# EAGLE board HTVC8038 (EAGLE 7.4.0)
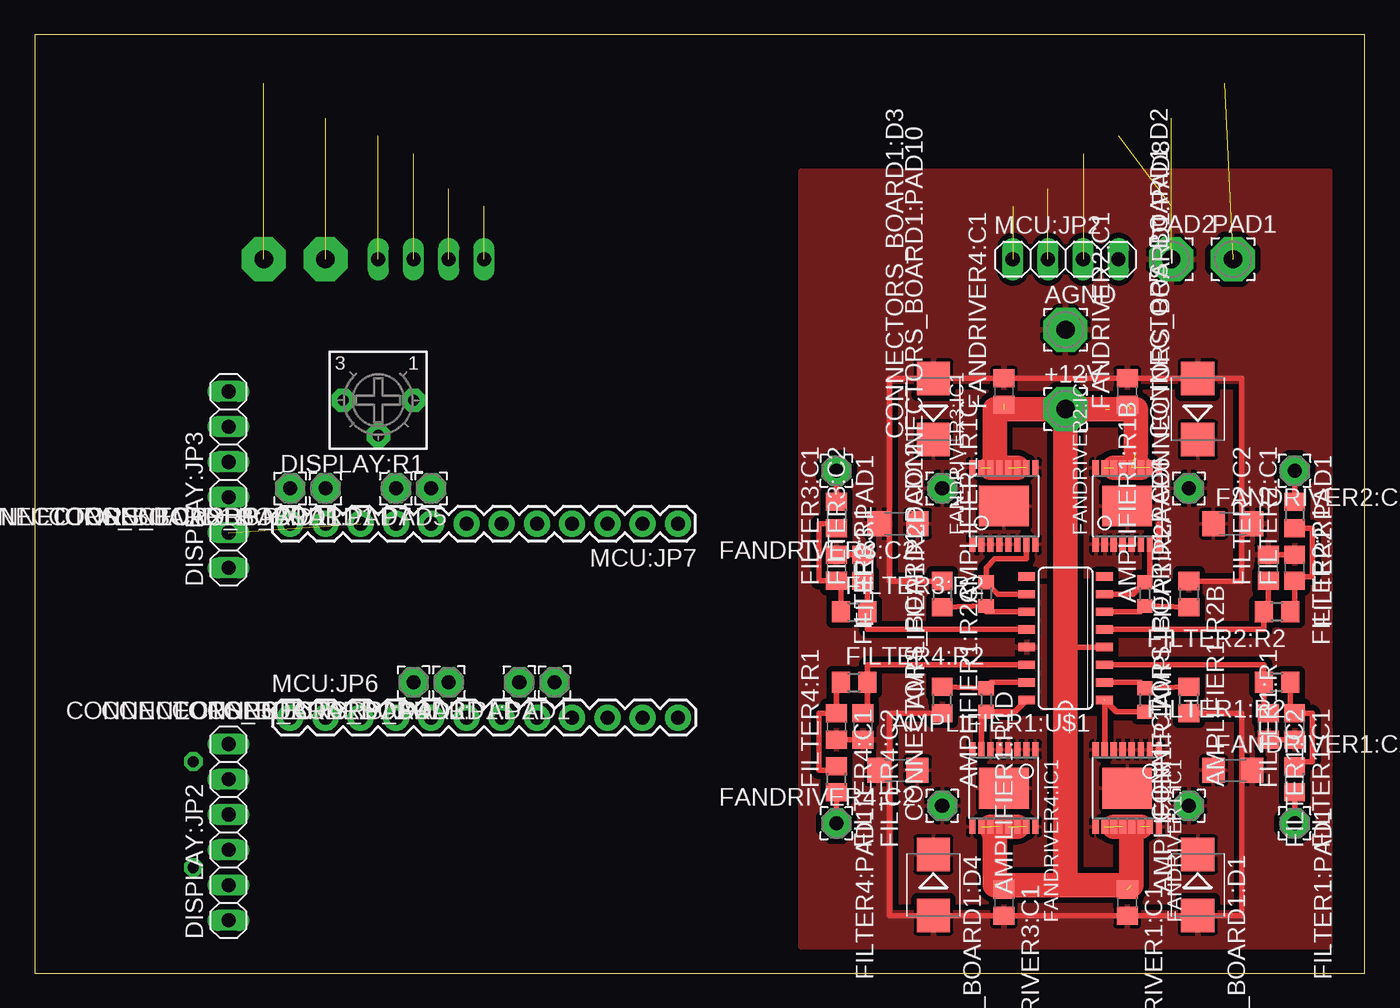
[diagram p0: board, top side]
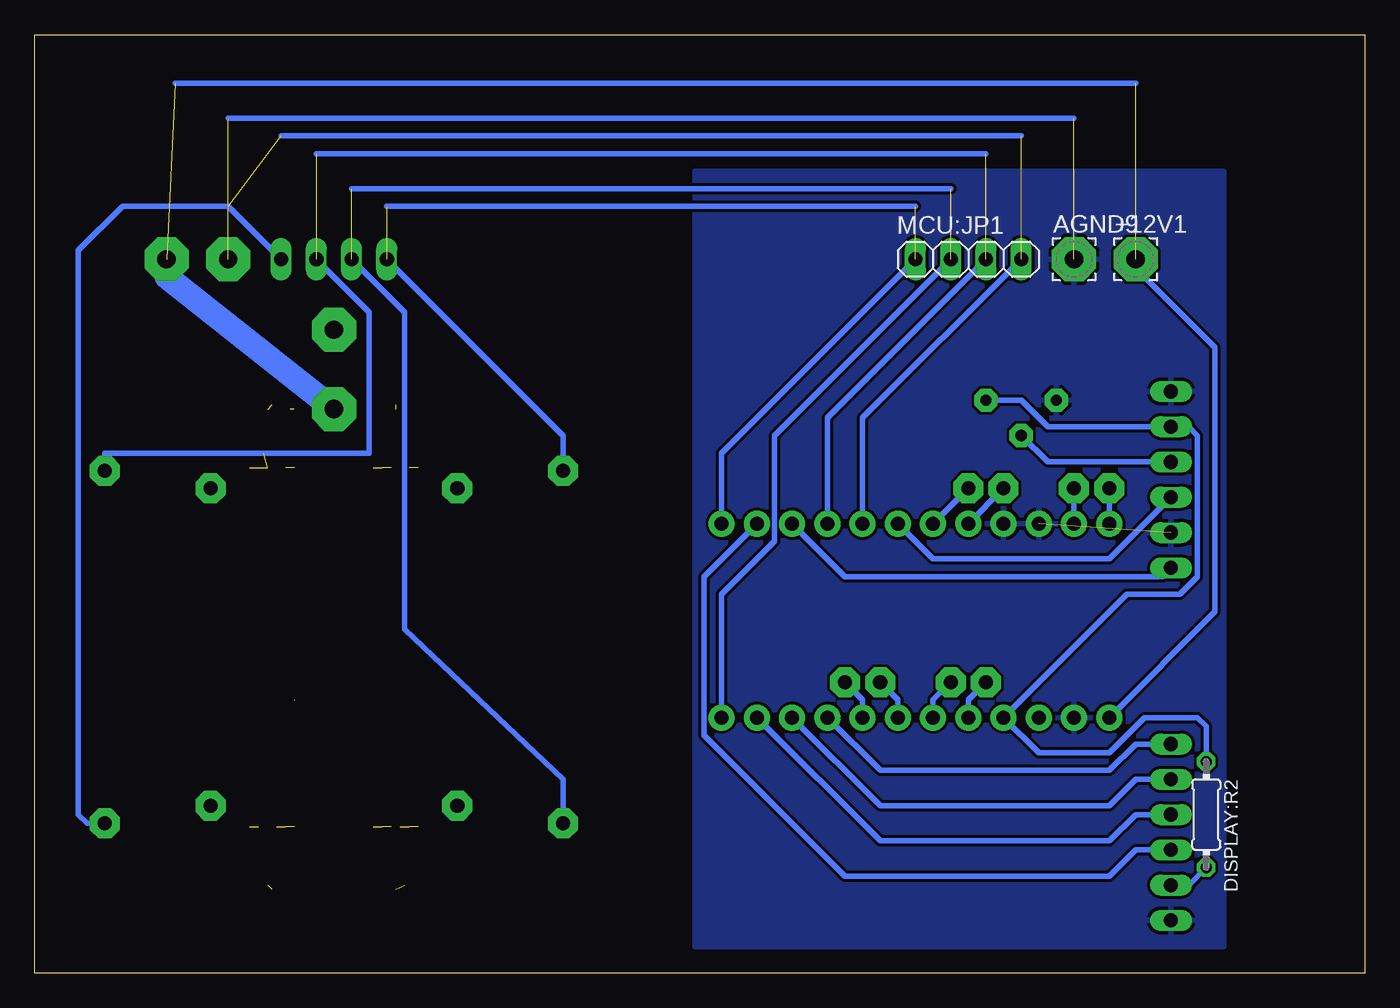
[diagram p1: board, bottom side, seen from below]

Size 95.87 x 67.62 mm. Coordinates in mm from the lower left corner, seen from the top.
Outline: 0,0 95.87,0 95.87,67.62 0,67.62 0,0
Copper layers (1*16): Top 0.035mm / dielectric 1.5mm / Bottom 0.035mm
Design rules "default *": minimum track width 10mil, minimum drill 24mil, track to track 8mil, track to pad 8mil, pad to pad 8mil, via to via 8mil, smd to smd 8mil, copper to edge 40mil, drill to drill 8mil, minimum pad ring 10mil, minimum via ring 8mil, stop-mask expansion 4mil, vias tented up to drill 0mil, thermal gap 10mil

## Footprints (pad centres in the part's own frame; a part is rotated, then mirrored left to right if it is on the bottom)
3,17/1,3 = drill 1.321 pad 3.175 octagon: 1 0,0
R0603 = smd 1 x 1.1: 1 -0.85,0; 2 0.85,0
R0805 = smd 1.3 x 1.5: 1 -0.95,0; 2 0.95,0
SO16 = smd 0.6 x 1.2: 1 -4.445,-2.8; 2 -3.175,-2.8; 3 -1.905,-2.8; 4 -0.635,-2.8; 5 0.635,-2.8; 6 1.905,-2.8; 7 3.175,-2.8; 8 4.445,-2.8; 9 4.445,2.8; 10 3.175,2.8; 11 1.905,2.8; 12 0.635,2.8; 13 -0.635,2.8; 14 -1.905,2.8; 15 -3.175,2.8; 16 -4.445,2.8
SMB-403A = smd 2.4 x 2.4: A 2.2,0; C -2.2,0
2,15/1,0 = drill 1.016 pad 2.159 octagon: 1 0,0
1X06 = drill 1.016 long: 1 -6.35,0; 2 -3.81,0; 3 -1.27,0; 4 1.27,0; 5 3.81,0; 6 6.35,0
3362P = drill 0.813 pad 1.676 octagon: 1 -2.54,0; 2 0,2.54; 3 2.54,0
0204/7 = drill 0.813 octagon: 1 -3.81,0; 2 3.81,0
C0805 = smd 1.3 x 1.5: 1 -0.95,0; 2 0.95,0
C1206 = smd 1.6 x 1.8: 1 -1.4,0; 2 1.4,0
TSSOP16EXP = smd 0.45 x 1.05: 1 -2.275,-2.768; 2 -1.625,-2.768; 3 -0.975,-2.768; 4 -0.325,-2.768; 5 0.325,-2.768; 6 0.975,-2.768; 7 1.625,-2.768; 8 2.275,-2.768; 9 2.275,2.768; 10 1.625,2.768; 11 0.975,2.768; 12 0.325,2.768; 13 -0.325,2.768; 14 -0.975,2.768; 15 -1.625,2.768; 16 -2.275,2.768 | smd 3.58 x 2.94: EXP 0,0
1X04 = drill 1.016 long: 1 -3.81,0; 2 -1.27,0; 3 1.27,0; 4 3.81,0
1X12 = drill 1.016 pad 1.88: 1 0,0; 2 2.54,0; 3 5.08,0; 4 7.62,0; 5 10.16,0; 6 12.7,0; 7 15.24,0; 8 17.78,0; 9 20.32,0; 10 22.86,0; 11 25.4,0; 12 27.94,0

## Placement (x,y rotation side)
+12V  [3,17/1,3]  74.29,40.64 0 top
+12V1  [3,17/1,3]  16.51,51.43 0 bottom
AGND  [3,17/1,3]  74.29,46.35 0 top
AGND9  [3,17/1,3]  20.95,51.43 0 bottom
AMPLIFIER1:R1A  14K  [R0603]  80.01,19.69 270 top
AMPLIFIER1:R1B  14K  [R0603]  80.01,27.3 90 top
AMPLIFIER1:R1C  14K  [R0603]  68.58,27.3 90 top
AMPLIFIER1:R1D  14K  [R0603]  68.58,19.69 270 top
AMPLIFIER1:R2A  10K  [R0805]  83.19,19.69 90 top
AMPLIFIER1:R2B  10K  [R0805]  83.19,27.3 270 top
AMPLIFIER1:R2C  10K  [R0805]  65.41,27.3 270 top
AMPLIFIER1:R2D  10K  [R0805]  65.41,19.69 90 top
AMPLIFIER1:U$1  LT1014  [SO16]  74.29,24.13 90 top
CONNECTORS_BOARD1:D1  MBRS240LT3  [SMB-403A]  83.82,6.35 270 top
CONNECTORS_BOARD1:D2  MBRS240LT3  [SMB-403A]  83.82,40.64 90 top
CONNECTORS_BOARD1:D3  MBRS240LT3  [SMB-403A]  64.77,40.64 90 top
CONNECTORS_BOARD1:D4  MBRS240LT3  [SMB-403A]  64.77,6.35 270 top
CONNECTORS_BOARD1:PAD1  [2,15/1,0]  37.47,20.95 180 top
CONNECTORS_BOARD1:PAD2  [2,15/1,0]  34.92,20.95 180 top
CONNECTORS_BOARD1:PAD3  [2,15/1,0]  29.84,20.95 180 top
CONNECTORS_BOARD1:PAD4  [2,15/1,0]  27.31,20.95 180 top
CONNECTORS_BOARD1:PAD5  [2,15/1,0]  28.58,34.93 180 top
CONNECTORS_BOARD1:PAD6  [2,15/1,0]  83.19,12.07 90 top
CONNECTORS_BOARD1:PAD7  [2,15/1,0]  26.03,34.93 180 top
CONNECTORS_BOARD1:PAD8  [2,15/1,0]  83.19,34.93 90 top
CONNECTORS_BOARD1:PAD9  [2,15/1,0]  18.42,34.93 180 top
CONNECTORS_BOARD1:PAD10  [2,15/1,0]  65.41,34.93 90 top
CONNECTORS_BOARD1:PAD11  [2,15/1,0]  20.95,34.93 180 top
CONNECTORS_BOARD1:PAD12  [2,15/1,0]  65.41,12.07 90 top
DISPLAY:JP2  [1X06]  13.97,10.16 90 top
DISPLAY:JP3  [1X06]  13.97,35.56 90 top
DISPLAY:R1  10k  [3362P]  24.77,41.27 180 top
DISPLAY:R2  470R  [0204/7]  11.43,11.43 270 bottom
FANDRIVER1:C1  2.2uF  [C0805]  78.74,5.08 270 top
FANDRIVER1:C2  10uF  [C1206]  86.36,14.61 0 top
FANDRIVER1:IC1  LT3083EFE  [TSSOP16EXP]  78.74,13.34 180 top
FANDRIVER2:C1  2.2uF  [C0805]  78.74,41.91 90 top
FANDRIVER2:C2  10uF  [C1206]  86.36,32.38 0 top
FANDRIVER2:IC1  LT3083EFE  [TSSOP16EXP]  78.74,33.66 0 top
FANDRIVER3:C1  2.2uF  [C0805]  69.85,5.08 270 top
FANDRIVER3:C2  10uF  [C1206]  62.23,32.38 180 top
FANDRIVER3:IC1  LT3083EFE  [TSSOP16EXP]  69.85,33.66 0 top
FANDRIVER4:C1  2.2uF  [C0805]  69.85,41.91 90 top
FANDRIVER4:C2  10uF  [C1206]  62.23,14.61 180 top
FANDRIVER4:IC1  LT3083EFE  [TSSOP16EXP]  69.85,13.34 180 top
FILTER1:C1  100n  [C0805]  90.81,17.78 270 top
FILTER1:C2  100n  [C0805]  88.9,17.78 270 top
FILTER1:PAD1  [2,15/1,0]  90.81,10.8 270 top
FILTER1:R1  100K  [R0805]  90.81,13.97 90 top
FILTER1:R2  100K  [R0805]  89.53,20.95 180 top
FILTER2:C1  100n  [C0805]  90.81,29.21 90 top
FILTER2:C2  100n  [C0805]  88.9,29.21 90 top
FILTER2:PAD1  [2,15/1,0]  90.81,36.2 270 top
FILTER2:R1  100K  [R0805]  90.81,33.02 270 top
FILTER2:R2  100K  [R0805]  89.53,26.04 180 top
FILTER3:C1  100n  [C0805]  57.78,29.21 90 top
FILTER3:C2  100n  [C0805]  59.69,29.21 90 top
FILTER3:PAD1  [2,15/1,0]  57.78,36.2 270 top
FILTER3:R1  100K  [R0805]  57.78,33.02 270 top
FILTER3:R2  100K  [R0805]  59.06,26.04 0 top
FILTER4:C1  100n  [C0805]  57.78,17.78 270 top
FILTER4:C2  100n  [C0805]  59.69,17.78 270 top
FILTER4:PAD1  [2,15/1,0]  57.78,10.8 270 top
FILTER4:R1  100K  [R0805]  57.78,13.97 90 top
FILTER4:R2  100K  [R0805]  59.06,20.95 0 top
MCU:JP1  [1X04]  28.58,51.43 0 bottom
MCU:JP2  [1X04]  74.29,51.43 0 top
MCU:JP6  [1X12]  18.42,18.41 0 top
MCU:JP7  [1X12]  46.36,32.38 180 top
PAD1  [3,17/1,3]  86.36,51.43 0 top
PAD2  [3,17/1,3]  81.91,51.43 0 top

## Library data of the parts
+12V +12V1 AGND AGND9 CONNECTORS_BOARD1:PAD1-CONNECTORS_BOARD1:PAD12 FILTER1:PAD1 FILTER2:PAD1 FILTER3:PAD1 FILTER4:PAD1 PAD1 PAD2 = wirepad
AMPLIFIER1:R1A AMPLIFIER1:R1B AMPLIFIER1:R1C AMPLIFIER1:R1D DISPLAY:R2 FANDRIVER1:C1 FANDRIVER1:C2 FANDRIVER2:C1 FANDRIVER2:C2 FANDRIVER3:C1 FANDRIVER3:C2 FANDRIVER4:C1 FANDRIVER4:C2 = rcl
AMPLIFIER1:R2A AMPLIFIER1:R2B AMPLIFIER1:R2C AMPLIFIER1:R2D FILTER1:C1 FILTER1:C2 FILTER1:R1 FILTER1:R2 FILTER2:C1 FILTER2:C2 FILTER2:R1 FILTER2:R2 FILTER3:C1 FILTER3:C2 FILTER3:R1 FILTER3:R2 FILTER4:C1 FILTER4:C2 FILTER4:R1 FILTER4:R2 = resistor
AMPLIFIER1:U$1 CONNECTORS_BOARD1:D1-CONNECTORS_BOARD1:D4 DISPLAY:R1 FANDRIVER1:IC1 FANDRIVER2:IC1 FANDRIVER3:IC1 FANDRIVER4:IC1 = nervus
DISPLAY:JP2 DISPLAY:JP3 MCU:JP1 MCU:JP2 = pinhead
MCU:JP6 MCU:JP7 = SparkFun

## Nets
+5V [+5V]: DISPLAY:JP3.5 DISPLAY:R1.1 DISPLAY:R2.1 MCU:JP6.4
A0: CONNECTORS_BOARD1:PAD1.1 MCU:JP6.8
A1: CONNECTORS_BOARD1:PAD2.1 MCU:JP6.7
A2: CONNECTORS_BOARD1:PAD3.1 MCU:JP6.6
A3: CONNECTORS_BOARD1:PAD4.1 MCU:JP6.5
AGND [AGND]: AGND9.1 AGND.1 AMPLIFIER1:R2A.1 AMPLIFIER1:R2B.1 AMPLIFIER1:R2C.1 AMPLIFIER1:R2D.1 AMPLIFIER1:U$1.13 CONNECTORS_BOARD1:D1.A CONNECTORS_BOARD1:D2.A CONNECTORS_BOARD1:D3.A CONNECTORS_BOARD1:D4.A DISPLAY:JP2.1 DISPLAY:JP3.2 DISPLAY:JP3.6 DISPLAY:R1.3 FANDRIVER1:C1.2 FANDRIVER1:C2.2 FANDRIVER2:C1.2 FANDRIVER2:C2.2 FANDRIVER3:C1.2 FANDRIVER3:C2.2 FANDRIVER4:C1.2 FANDRIVER4:C2.2 FILTER1:C1.2 FILTER1:C2.2 FILTER2:C1.2 FILTER2:C2.2 FILTER3:C1.2 FILTER3:C2.2 FILTER4:C1.2 FILTER4:C2.2 MCU:JP6.2 MCU:JP7.9 MCU:JP7.10 PAD2.1
AMPLIFIER1:N$1: AMPLIFIER1:R1B.1 AMPLIFIER1:R2B.2 AMPLIFIER1:U$1.6
AMPLIFIER1:N$2: AMPLIFIER1:R1C.1 AMPLIFIER1:R2C.2 AMPLIFIER1:U$1.11
AMPLIFIER1:N$3: AMPLIFIER1:R1D.1 AMPLIFIER1:R2D.2 AMPLIFIER1:U$1.15
AMPLIFIER1:N$9: AMPLIFIER1:R1A.1 AMPLIFIER1:R2A.2 AMPLIFIER1:U$1.2
DISPLAY:N$1: DISPLAY:JP3.4 DISPLAY:R1.2
DISPLAY:N$2: DISPLAY:JP2.2 DISPLAY:R2.2
FILTER1:N$8: FILTER1:C1.1 FILTER1:R1.2 FILTER1:R2.1
FILTER2:N$8: FILTER2:C1.1 FILTER2:R1.2 FILTER2:R2.1
FILTER3:N$8: FILTER3:C1.1 FILTER3:R1.2 FILTER3:R2.1
FILTER4:N$8: FILTER4:C1.1 FILTER4:R1.2 FILTER4:R2.1
MCU:RESET: MCU:JP6.3
N$1: DISPLAY:JP3.3 MCU:JP7.6
N$2: DISPLAY:JP3.1 MCU:JP7.3
N$3: DISPLAY:JP2.6 MCU:JP6.9
N$4: DISPLAY:JP2.5 MCU:JP6.10
N$5: DISPLAY:JP2.4 MCU:JP6.11
N$6: DISPLAY:JP2.3 MCU:JP7.2
N$9: CONNECTORS_BOARD1:D4.C CONNECTORS_BOARD1:PAD12.1 FANDRIVER4:C2.1 FANDRIVER4:IC1.1 FANDRIVER4:IC1.2 FANDRIVER4:IC1.3 FANDRIVER4:IC1.4 FANDRIVER4:IC1.5 FANDRIVER4:IC1.6 FANDRIVER4:IC1.8 FANDRIVER4:IC1.9 FANDRIVER4:IC1.16 FANDRIVER4:IC1.EXP
N$10: CONNECTORS_BOARD1:D3.C CONNECTORS_BOARD1:PAD10.1 FANDRIVER3:C2.1 FANDRIVER3:IC1.1 FANDRIVER3:IC1.2 FANDRIVER3:IC1.3 FANDRIVER3:IC1.4 FANDRIVER3:IC1.5 FANDRIVER3:IC1.6 FANDRIVER3:IC1.8 FANDRIVER3:IC1.9 FANDRIVER3:IC1.16 FANDRIVER3:IC1.EXP
N$11: CONNECTORS_BOARD1:D2.C CONNECTORS_BOARD1:PAD8.1 FANDRIVER2:C2.1 FANDRIVER2:IC1.1 FANDRIVER2:IC1.2 FANDRIVER2:IC1.3 FANDRIVER2:IC1.4 FANDRIVER2:IC1.5 FANDRIVER2:IC1.6 FANDRIVER2:IC1.8 FANDRIVER2:IC1.9 FANDRIVER2:IC1.16 FANDRIVER2:IC1.EXP
N$12: CONNECTORS_BOARD1:D1.C CONNECTORS_BOARD1:PAD6.1 FANDRIVER1:C2.1 FANDRIVER1:IC1.1 FANDRIVER1:IC1.2 FANDRIVER1:IC1.3 FANDRIVER1:IC1.4 FANDRIVER1:IC1.5 FANDRIVER1:IC1.6 FANDRIVER1:IC1.8 FANDRIVER1:IC1.9 FANDRIVER1:IC1.16 FANDRIVER1:IC1.EXP
N$21: FILTER1:PAD1.1 FILTER1:R1.1 MCU:JP1.4 MCU:JP2.4 MCU:JP7.5
N$22: FILTER2:PAD1.1 FILTER2:R1.1 MCU:JP1.3 MCU:JP2.3 MCU:JP7.4
N$23: FILTER3:PAD1.1 FILTER3:R1.1 MCU:JP1.1 MCU:JP2.1 MCU:JP7.1
N$37: FILTER4:PAD1.1 FILTER4:R1.1 MCU:JP1.2 MCU:JP2.2 MCU:JP6.12
N$45: AMPLIFIER1:U$1.3 FILTER1:C2.1 FILTER1:R2.2
N$46: AMPLIFIER1:U$1.5 FILTER2:C2.1 FILTER2:R2.2
N$47: AMPLIFIER1:U$1.12 FILTER3:C2.1 FILTER3:R2.2
N$48: AMPLIFIER1:U$1.14 FILTER4:C2.1 FILTER4:R2.2
N$49: AMPLIFIER1:R1A.2 AMPLIFIER1:U$1.1 FANDRIVER1:IC1.7
N$50: AMPLIFIER1:R1B.2 AMPLIFIER1:U$1.7 FANDRIVER2:IC1.7
N$51: AMPLIFIER1:R1C.2 AMPLIFIER1:U$1.10 FANDRIVER3:IC1.7
N$52: AMPLIFIER1:R1D.2 AMPLIFIER1:U$1.16 FANDRIVER4:IC1.7
TACH0: CONNECTORS_BOARD1:PAD5.1 MCU:JP7.7
TACH1: CONNECTORS_BOARD1:PAD7.1 MCU:JP7.8
TACH2: CONNECTORS_BOARD1:PAD9.1 MCU:JP7.12
TACH3: CONNECTORS_BOARD1:PAD11.1 MCU:JP7.11
VCC [VCC]: +12V1.1 +12V.1 AMPLIFIER1:U$1.4 FANDRIVER1:C1.1 FANDRIVER1:IC1.10 FANDRIVER1:IC1.11 FANDRIVER1:IC1.12 FANDRIVER1:IC1.13 FANDRIVER1:IC1.14 FANDRIVER1:IC1.15 FANDRIVER2:C1.1 FANDRIVER2:IC1.10 FANDRIVER2:IC1.11 FANDRIVER2:IC1.12 FANDRIVER2:IC1.13 FANDRIVER2:IC1.14 FANDRIVER2:IC1.15 FANDRIVER3:C1.1 FANDRIVER3:IC1.10 FANDRIVER3:IC1.11 FANDRIVER3:IC1.12 FANDRIVER3:IC1.13 FANDRIVER3:IC1.14 FANDRIVER3:IC1.15 FANDRIVER4:C1.1 FANDRIVER4:IC1.10 FANDRIVER4:IC1.11 FANDRIVER4:IC1.12 FANDRIVER4:IC1.13 FANDRIVER4:IC1.14 FANDRIVER4:IC1.15 MCU:JP6.1 PAD1.1

## Tracks (layer width: path | path; a pad name or v marks a point on that pad's centre or on a via)
+5V
  Bottom 0.406: DISPLAY:R2.1 11.43,17.78 12.06,18.41 15.88,18.41 18.42,15.88 23.5,15.88 MCU:JP6.4 17.14,27.3 13.34,27.3 12.06,28.58 12.06,38.73 12.7,39.37 DISPLAY:JP3.5 22.86,39.37 24.77,41.27 DISPLAY:R1.1
A0
  Bottom 0.406: MCU:JP6.8 36.2,19.69 CONNECTORS_BOARD1:PAD1.1
A1
  Bottom 0.406: MCU:JP6.7 33.66,19.69 CONNECTORS_BOARD1:PAD2.1
A2
  Bottom 0.406: MCU:JP6.6 31.11,19.69 CONNECTORS_BOARD1:PAD3.1
A3
  Bottom 0.406: MCU:JP6.5 28.58,19.69 CONNECTORS_BOARD1:PAD4.1
AGND  (3 unrouted)
  Top 0.406: FILTER1:C1.2 FILTER1:C2.2 | 83.5,18.41 AMPLIFIER1:R2A.1 87,18.73 87,4.13 FANDRIVER1:C1.2 FANDRIVER3:C1.2 61.59,4.13 61.59,18.73 AMPLIFIER1:R2D.1 | FILTER2:C2.2 FILTER2:C1.2 | 57.78,17.15 FILTER4:C1.2 FILTER4:C2.2 | FILTER3:C1.2 FILTER3:C2.2 | AMPLIFIER1:R2C.1 61.59,28.26 61.59,42.86 FANDRIVER4:C1.2 FANDRIVER2:C1.2 87,42.86 87,28.26 AMPLIFIER1:R2B.1
  Bottom 0.406: 20.95,61.6 81.91,61.6
  pour Top (isolate 0.406, rank 2): 93.34,57.79 93.34,1.91 55.25,1.91 55.25,57.79
  pour Bottom: 10.16,57.79 10.16,1.91 48.26,1.91 48.26,57.79
AMPLIFIER1:N$1
  Top 0.406: AMPLIFIER1:U$1.6 79.69,26.04 AMPLIFIER1:R1B.1 AMPLIFIER1:R2B.2
AMPLIFIER1:N$2
  Top 0.406: AMPLIFIER1:U$1.11 68.58,26.04 AMPLIFIER1:R1C.1 AMPLIFIER1:R2C.2
AMPLIFIER1:N$3
  Top 0.406: AMPLIFIER1:U$1.15 68.9,20.95 AMPLIFIER1:R1D.1 AMPLIFIER1:R2D.2
AMPLIFIER1:N$9
  Top 0.406: AMPLIFIER1:R2A.2 AMPLIFIER1:R1A.1 79.69,20.95 AMPLIFIER1:U$1.2
DISPLAY:N$1
  Bottom 0.406: DISPLAY:JP3.4 22.86,36.83 DISPLAY:R1.2
DISPLAY:N$2
  Bottom 0.406: DISPLAY:R2.2 12.7,6.35 DISPLAY:JP2.2
FILTER1:N$8
  Top 0.406: FILTER1:R2.1 90.49,19.05 FILTER1:C1.1 92.07,18.73 92.07,15.24 90.81,15.24 FILTER1:R1.2
FILTER2:N$8
  Top 0.406: FILTER2:R2.1 90.81,26.04 FILTER2:C1.1 90.81,28.58 92.07,28.58 92.07,32.07 FILTER2:R1.2
FILTER3:N$8
  Top 0.406: 58.42,26.35 FILTER3:R2.1 58.11,28.26 FILTER3:C1.1 56.52,28.26 56.52,32.38 57.78,32.38 FILTER3:R1.2
FILTER4:N$8
  Top 0.406: FILTER4:R2.1 57.78,20.95 FILTER4:C1.1 56.52,18.73 56.52,14.61 57.78,14.61 FILTER4:R1.2
N$1
  Bottom 0.406: DISPLAY:JP3.3 18.42,29.84 31.11,29.84 MCU:JP7.6
N$2
  Bottom 0.406: DISPLAY:JP3.1 14.61,28.58 37.47,28.58 MCU:JP7.3
N$3
  Bottom 0.406: DISPLAY:JP2.6 16.51,16.51 18.42,14.61 34.92,14.61 MCU:JP6.9
N$4
  Bottom 0.406: DISPLAY:JP2.5 16.51,13.97 18.42,12.07 34.92,12.07 MCU:JP6.10
N$5
  Bottom 0.406: DISPLAY:JP2.4 16.51,11.43 18.42,9.53 34.92,9.53 MCU:JP6.11
N$6
  Bottom 0.406: MCU:JP7.2 47.62,28.58 47.62,17.15 37.47,6.98 18.42,6.98 16.51,8.89 DISPLAY:JP2.3
N$9
  pour Top (isolate 0.406): 62.23,18.41 73.03,18.41 73.03,5.08 62.23,5.08
N$10
  pour Top (isolate 0.406): 62.23,41.91 73.03,41.91 73.03,28.58 62.23,28.58
N$11
  Top 0.406: FANDRIVER2:IC1.8 81.02,32.38
  pour Top (isolate 0.406): 75.56,41.91 86.36,41.91 86.36,28.58 75.56,28.58
N$12
  pour Top (isolate 0.406): 75.56,18.41 86.36,18.41 86.36,5.08 75.56,5.08
N$21  (2 unrouted)
  Top 0.406: FILTER1:R1.1 FILTER1:PAD1.1
  Bottom 0.406: 24.77,60.32 78.1,60.32 | MCU:JP2.4 81.91,55.24 89.53,55.24 92.71,52.07 92.71,11.43 92.07,10.8 FILTER1:PAD1.1 | MCU:JP1.4 36.2,40.01 MCU:JP7.5
N$22  (2 unrouted)
  Top 0.406: FILTER2:PAD1.1 FILTER2:R1.1
  Bottom 0.406: 27.31,59.05 75.56,59.05 | MCU:JP2.3 71.75,47.63 71.75,37.47 90.81,37.47 FILTER2:PAD1.1 | MCU:JP1.3 38.73,40.01 MCU:JP7.4
N$23  (2 unrouted)
  Top 0.406: FILTER3:R1.1 FILTER3:PAD1.1
  Bottom 0.406: MCU:JP2.1 57.78,38.73 FILTER3:PAD1.1 | 32.39,55.24 70.49,55.24 | MCU:JP7.1 46.36,37.47 MCU:JP1.1
N$37  (2 unrouted)
  Top 0.406: FILTER4:PAD1.1 FILTER4:R1.1
  Bottom 0.406: MCU:JP2.2 69.22,47.63 69.22,24.77 57.78,13.97 FILTER4:PAD1.1 | 29.84,56.52 73.03,56.52 | MCU:JP6.12 46.36,27.3 42.55,31.12 42.55,38.73 MCU:JP1.2
N$45
  Top 0.406: FILTER1:C2.1 88.59,19.05 FILTER1:R2.2 88.59,22.23 AMPLIFIER1:U$1.3
N$46
  Top 0.406: AMPLIFIER1:U$1.5 88.59,24.77 FILTER2:R2.2 | FILTER2:R2.2 88.27,26.04 | FILTER2:R2.2 88.9,26.04 FILTER2:C2.1
N$47
  Top 0.406: AMPLIFIER1:U$1.12 60,24.77 FILTER3:R2.2 60,27.94 FILTER3:C2.1
N$48
  Top 0.406: FILTER4:C2.1 60,18.73 FILTER4:R2.2 60,22.23 AMPLIFIER1:U$1.14
N$49  (1 unrouted)
  Top 0.406: FANDRIVER1:IC1.7 77.12,19.66 77.94,18.84 AMPLIFIER1:R1A.2
N$50
  Top 0.406: FANDRIVER2:IC1.7 80.37,28.26 AMPLIFIER1:R1B.2 79.16,27.3 AMPLIFIER1:U$1.7
N$51
  Top 0.406: 71.47,30.52 FANDRIVER3:IC1.7 71.47,29.84 69.22,29.84 68.58,29.21 AMPLIFIER1:R1C.2 69.43,27.3 AMPLIFIER1:U$1.10
N$52
  Top 0.406: FANDRIVER4:IC1.7 68.22,19.09 AMPLIFIER1:R1D.2 70.65,18.84 AMPLIFIER1:U$1.16
TACH0
  Bottom 0.406: MCU:JP7.7 CONNECTORS_BOARD1:PAD5.1
TACH1
  Bottom 0.406: MCU:JP7.8 CONNECTORS_BOARD1:PAD7.1
TACH2
  Bottom 0.406: MCU:JP7.12 CONNECTORS_BOARD1:PAD9.1
TACH3
  Bottom 0.406: MCU:JP7.11 CONNECTORS_BOARD1:PAD11.1
VCC  (21 unrouted)
  Top 0.406: 70.13,40.96 FANDRIVER4:C1.1 | AMPLIFIER1:U$1.4 74.29,23.49 | 79.03,9.9 FANDRIVER1:IC1.13
  Top 1.778: 77.18,40.64 +12V.1 | +12V.1 69.85,40.64 | FANDRIVER3:IC1.14 FANDRIVER3:IC1.13 | FANDRIVER3:IC1.13 FANDRIVER3:IC1.11 | FANDRIVER2:IC1.11 FANDRIVER2:IC1.13 FANDRIVER2:IC1.14 | 74.29,6.35 79.03,6.35 79.03,9.9 | 74.29,6.35 69.22,6.35 69.22,9.93 FANDRIVER4:IC1.11 FANDRIVER4:IC1.14 | FANDRIVER1:IC1.11 FANDRIVER1:IC1.13 FANDRIVER1:IC1.14 | 79.05,40.64 77.47,40.64 | 74.29,6.35 74.29,23.49 +12V.1 | FANDRIVER3:IC1.13 69.22,37.06 69.22,40.64 +12V.1 | +12V.1 79.38,40.64 79.38,37.47
  Bottom 0.406: 16.51,64.13 85.72,64.13 | 85.72,51.43 PAD1.1 | MCU:JP6.1 10.8,26.04 10.8,45.09 16.51,50.8 +12V1.1
  Bottom 1.778: PAD1.1 86.36,50.16 +12V.1